# EAGLE board peephole (EAGLE 6.5.0)
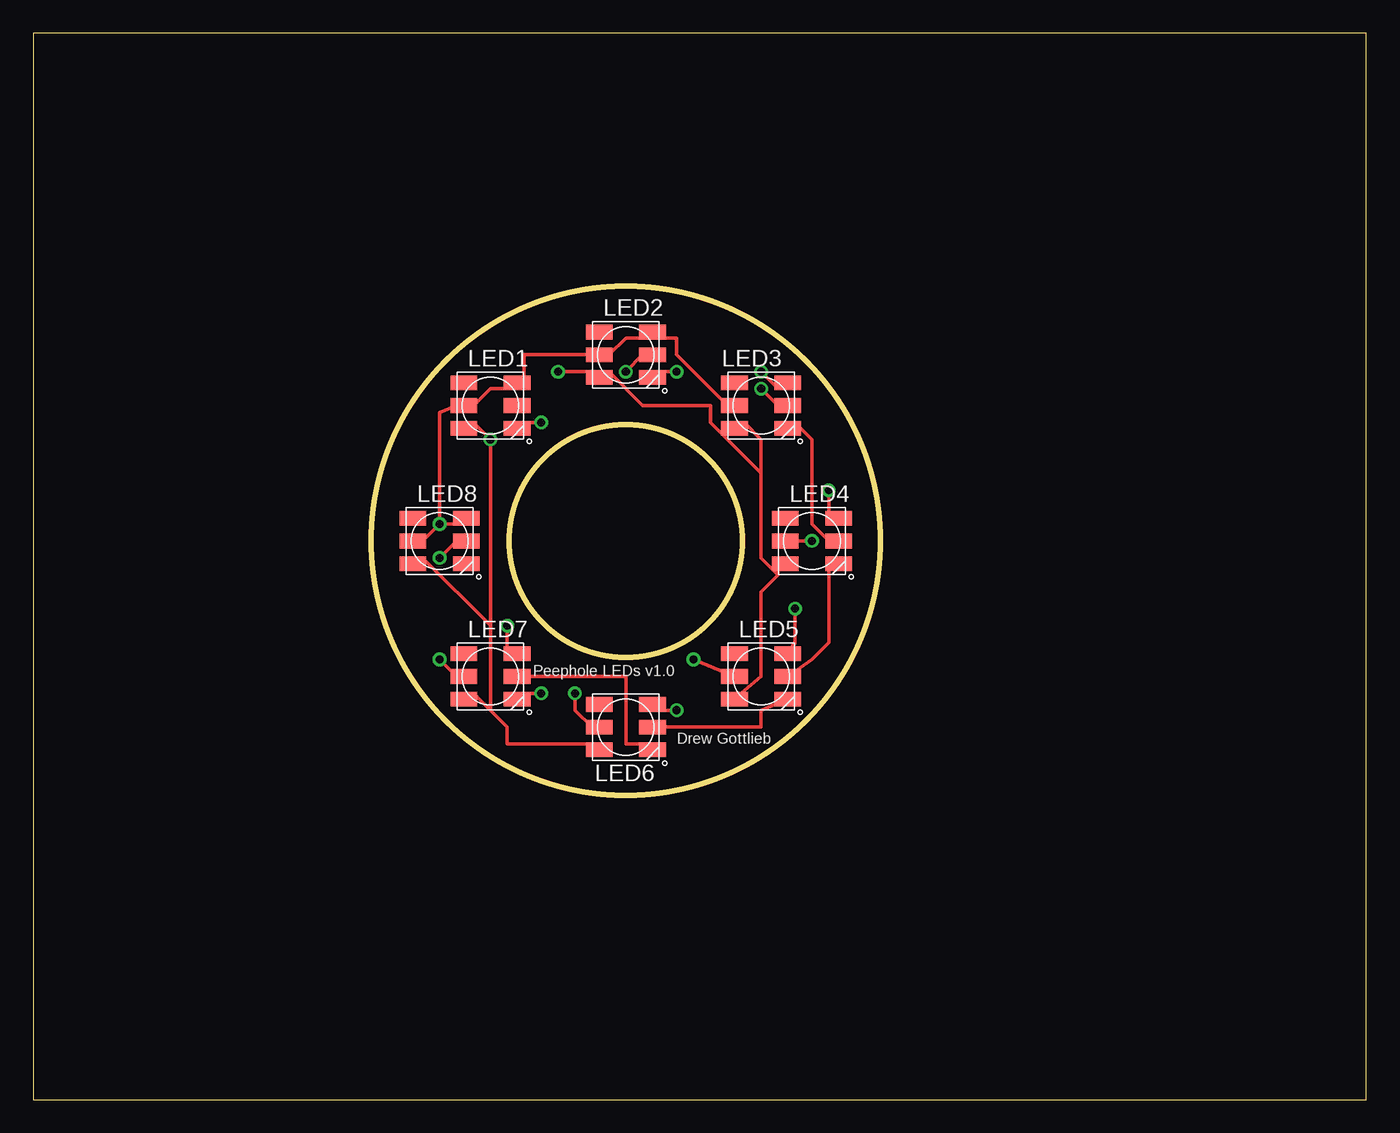
[diagram p0: board, top side]
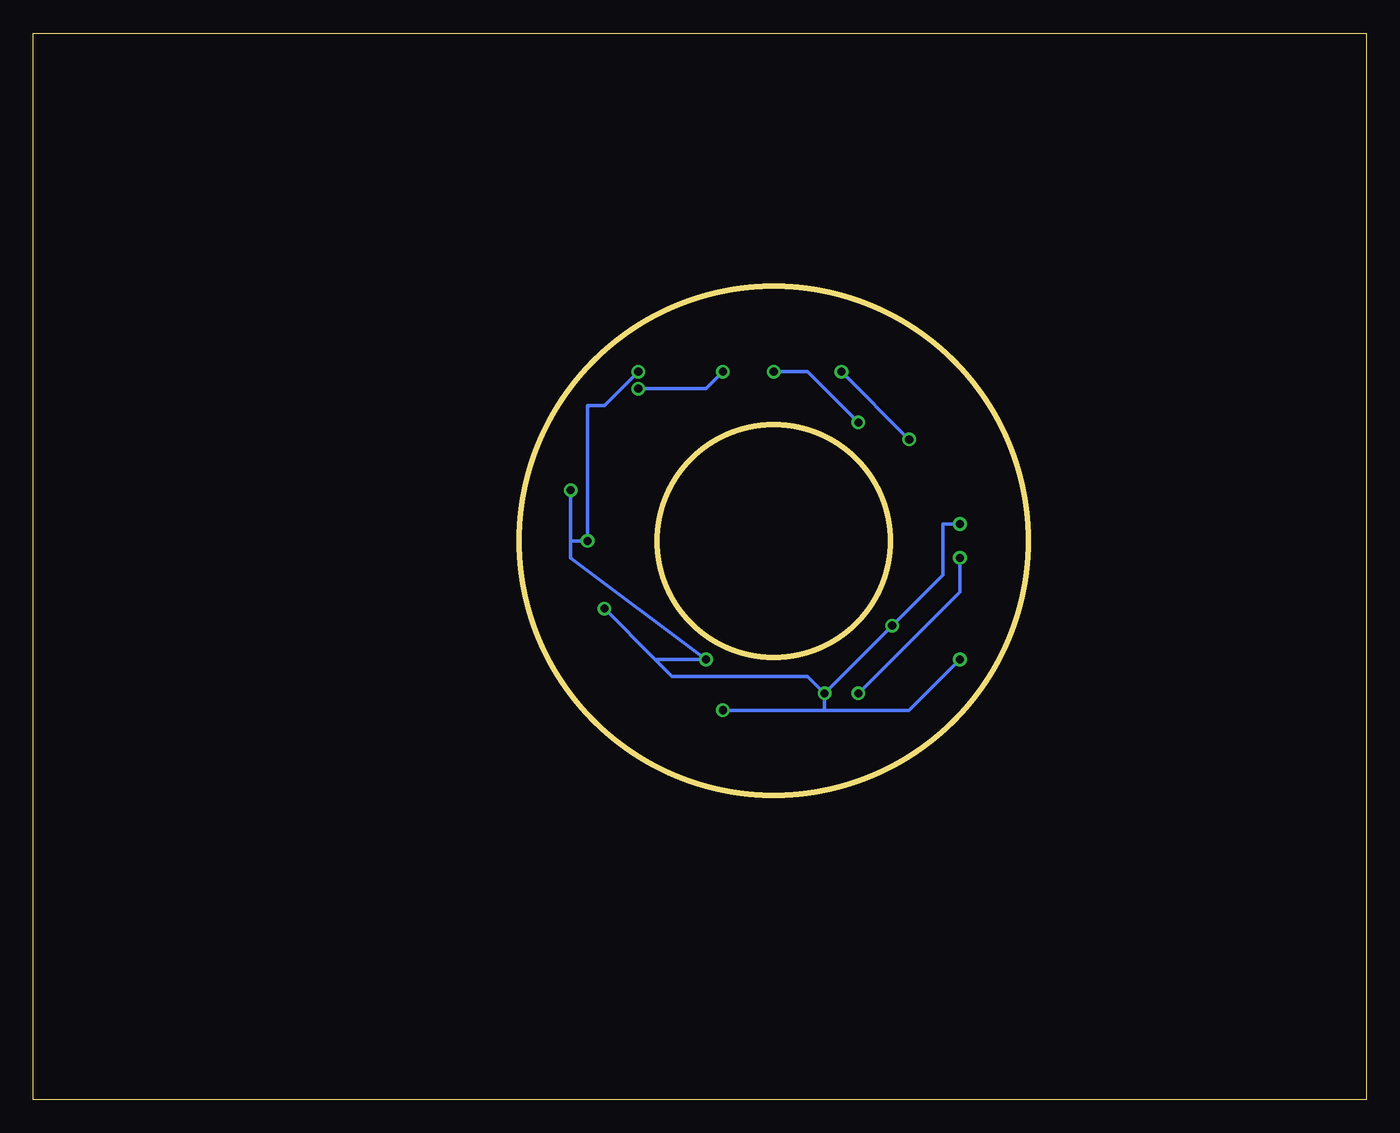
[diagram p1: board, bottom side, seen from below]

Size 100 x 80 mm. Coordinates in mm from the lower left corner, seen from the top.
Outline: 0,0 100,0 100,80 0,80 0,0
Outline: circle at 44.45,41.91 radius 8.73
Outline: circle at 44.45,41.91 radius 19.09
Copper layers (1*16): Top 0.035mm / dielectric 1.5mm / Bottom 0.035mm
Design rules "default": minimum track width 10mil, minimum drill 24mil, track to track 8mil, track to pad 8mil, pad to pad 8mil, via to via 8mil, smd to smd 8mil, copper to edge 40mil, drill to drill 8mil, minimum pad ring 10mil, minimum via ring 8mil, stop-mask expansion 4mil, vias tented up to drill 0mil, thermal gap 10mil

## Footprints (pad centres in the part's own frame; a part is rotated, then mirrored left to right if it is on the bottom)
WS2812 = smd 2 x 1.1: DI 2,0; DO 2,-1.7; LEDVDD -2,0; NC -2,1.7; VDD 2,1.7; VSS -2,-1.7

## Placement (x,y rotation side)
LED1  WS2812  [WS2812]  34.29,52.07 0 top
LED2  WS2812  [WS2812]  44.45,55.88 0 top
LED3  WS2812  [WS2812]  54.61,52.07 0 top
LED4  WS2812  [WS2812]  58.42,41.91 0 top
LED5  WS2812  [WS2812]  54.61,31.75 0 top
LED6  WS2812  [WS2812]  44.45,27.94 0 top
LED7  WS2812  [WS2812]  34.29,31.75 0 top
LED8  WS2812  [WS2812]  30.48,41.91 0 top

## Library data of the parts
LED1-LED8 = adafruit

## Nets
DATA: LED1.DI
GND: LED1.VSS LED2.VSS LED3.VSS LED4.VSS LED5.VSS LED6.VSS LED7.VSS LED8.VSS
N$1: LED5.DO LED6.DI
N$2: LED6.DO LED7.DI
N$3: LED7.DO LED8.DI
N$4: LED4.DO LED5.DI
N$5: LED3.DO LED4.DI
N$6: LED2.DO LED3.DI
N$7: LED1.DO LED2.DI
VDD: LED1.LEDVDD LED1.VDD LED2.LEDVDD LED2.VDD LED3.LEDVDD LED3.VDD LED4.LEDVDD LED4.VDD LED5.LEDVDD LED5.VDD LED6.LEDVDD LED6.VDD LED7.LEDVDD LED7.VDD LED8.LEDVDD LED8.VDD

## Tracks (layer width: path | path; a pad name or v marks a point on that pad's centre or on a via)
GND  (via drill 0.61)
  Top 0.254: 55.88,39.37 55.88,40.64 LED4.VSS | 55.88,39.37 54.61,38.1 54.61,31.75 LED5.VSS | 54.61,46.99 54.61,40.64 55.88,39.37 | 54.61,46.99 54.61,49.53 53.34,50.8 LED3.VSS | 54.61,46.99 50.8,50.8 50.8,52.07 45.72,52.07 43.18,54.61 LED2.VSS 41.91,54.61 v39.37,54.61 | 34.29,29.21 33.02,30.48 LED7.VSS | 34.29,29.21 35.56,27.94 35.56,26.67 41.91,26.67 LED6.VSS | 34.29,35.56 29.21,40.64 LED8.VSS | 34.29,29.21 34.29,35.56 | 34.29,35.56 v34.29,49.53 33.02,50.8 LED1.VSS
  Bottom 0.254: v34.29,49.53 v39.37,54.61
N$1
  Top 0.254: LED6.DI 54.61,27.94 54.61,29.21 LED5.DO
N$2
  Top 0.254: LED7.DI 44.45,31.75 44.45,26.67 45.72,26.67 LED6.DO
N$3  (via drill 0.61)
  Top 0.254: v38.1,30.48 36.83,30.48 LED7.DO | v30.48,40.64 31.75,41.91 LED8.DI
  Bottom 0.254: v38.1,30.48 30.48,38.1 v30.48,40.64
N$4
  Top 0.254: LED5.DI 58.42,33.02 59.69,34.29 59.69,40.64 LED4.DO
N$5
  Top 0.254: LED4.DI 59.69,41.91 58.42,43.18 58.42,49.53 57.15,50.8 LED3.DO
N$6  (via drill 0.61)
  Top 0.254: v48.26,54.61 46.99,54.61 LED2.DO | v54.61,53.34 55.88,52.07 LED3.DI
  Bottom 0.254: v48.26,54.61 49.53,53.34 v54.61,53.34
N$7  (via drill 0.61)
  Top 0.254: v38.1,50.8 36.83,50.8 LED1.DO | v44.45,54.61 45.72,55.88 LED2.DI
  Bottom 0.254: v38.1,50.8 41.91,54.61 v44.45,54.61
VDD  (via drill 0.61)
  Top 0.254: LED3.LEDVDD 52.07,52.07 48.26,55.88 48.26,57.15 46.99,57.15 LED2.VDD 45.72,57.15 44.45,57.15 43.18,55.88 LED2.LEDVDD 36.83,55.88 36.83,53.34 LED1.VDD 35.56,53.34 34.29,53.34 33.02,52.07 LED1.LEDVDD 31.75,52.07 30.48,51.54 v30.48,43.18 | v58.42,41.91 LED4.LEDVDD | v54.61,54.61 55.88,53.34 LED3.VDD | v49.53,33.02 LED5.LEDVDD | v59.69,45.72 59.69,43.18 LED4.VDD | v40.64,30.48 40.64,29.21 41.91,27.94 LED6.LEDVDD | v57.15,36.83 57.15,34.29 LED5.VDD | v30.48,33.02 31.75,31.75 LED7.LEDVDD | v48.26,29.21 46.99,29.21 LED6.VDD | v30.48,43.18 29.21,41.91 LED8.LEDVDD | v30.48,43.18 31.75,43.18 LED8.VDD 33.02,43.18 | v35.56,35.56 35.56,33.02 LED7.VDD
  Bottom 0.254: v54.61,54.61 57.15,52.07 58.42,52.07 v58.42,41.91 59.69,41.91 | v59.69,45.72 59.69,41.91 | 59.69,41.91 59.69,40.64 v49.53,33.02 53.34,33.02 | v40.64,30.48 41.91,31.75 52.07,31.75 53.34,33.02 | v57.15,36.83 53.34,33.02 | v30.48,33.02 34.29,29.21 40.64,29.21 | v48.26,29.21 40.64,29.21 | v30.48,43.18 31.75,43.18 31.75,39.37 v35.56,35.56 v40.64,30.48 | v40.64,30.48 40.64,29.21

## Text on the board
tNames: Peephole LEDs v1.0 | Drew Gottlieb